# Altium PCB 6C-2L-1550um.PcbDoc (part 1 of 2)
Units mm, origin at the board's own origin, x right, y up, seen from the top; angles counter-clockwise.
Board outline 168.66 x 49.53 mm, 2 copper layers (Top Layer, Bottom Layer), stack 1.586 mm thick; 107 components, 120 nets, 578 pads, 231 vias.
Unrouted connection lines stored in the file: 1.
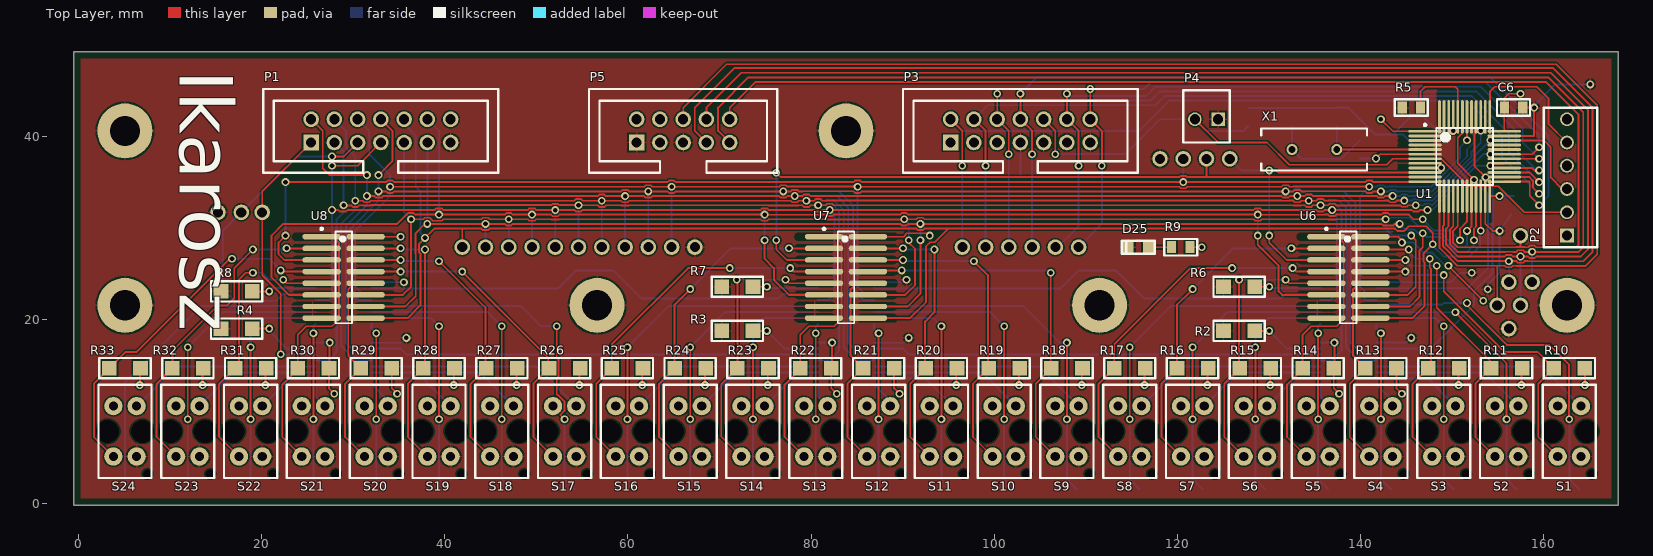
[diagram p0: Top Layer view]
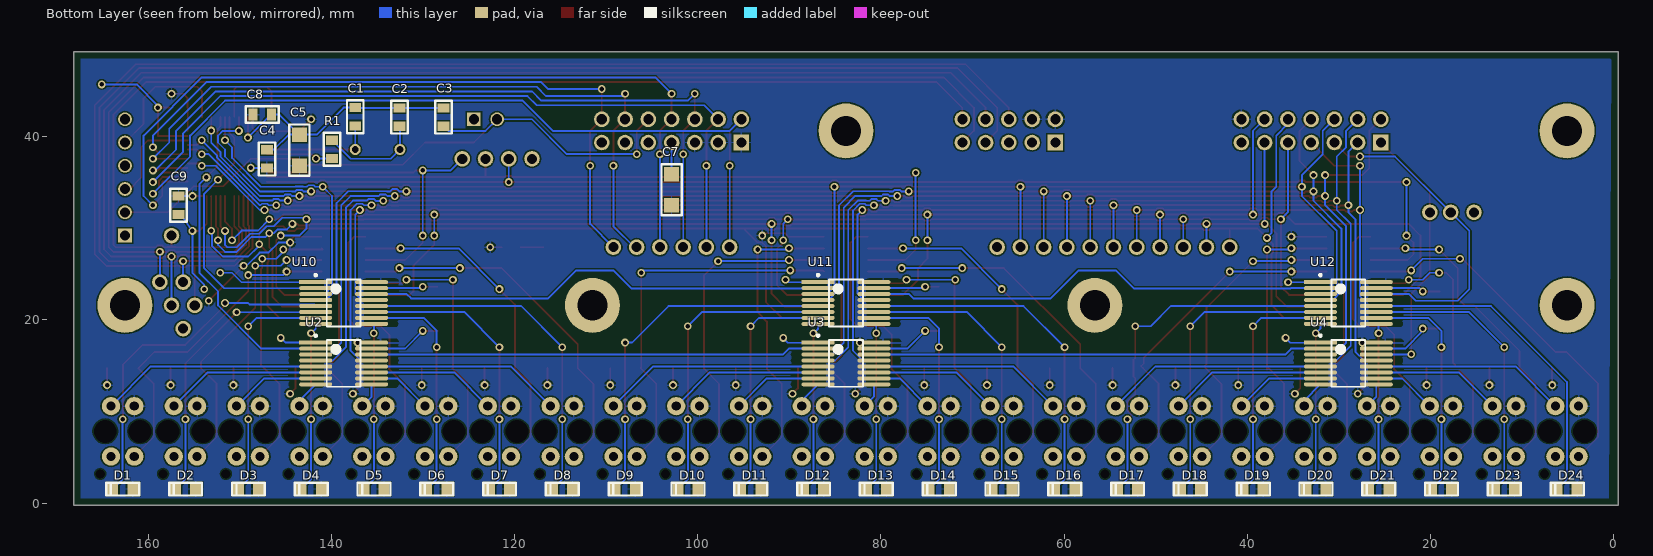
[diagram p1: Bottom Layer view, seen from below]
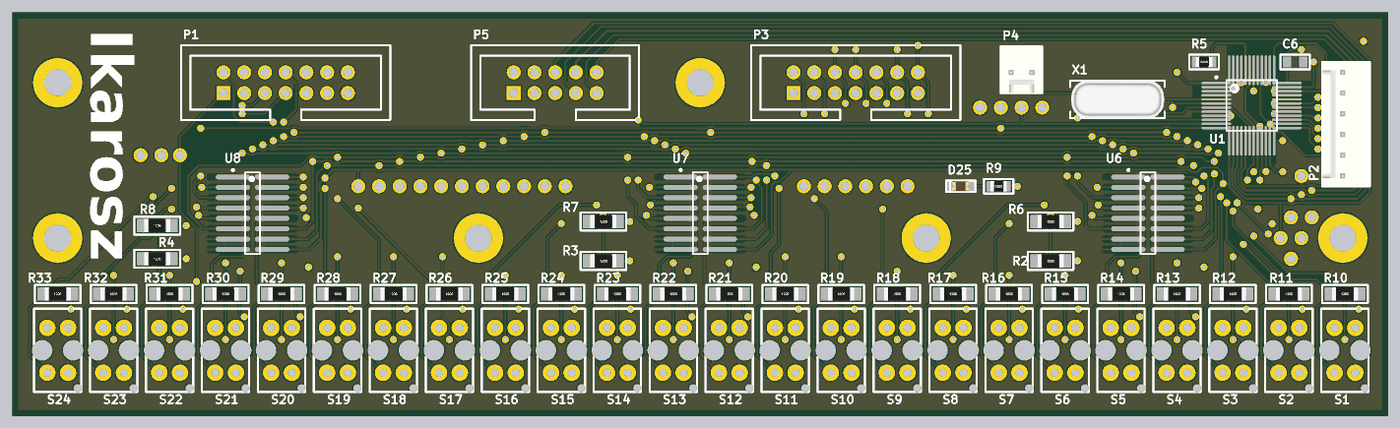
[diagram p3: 3D render of the assembled board from above, using the file's embedded part models]
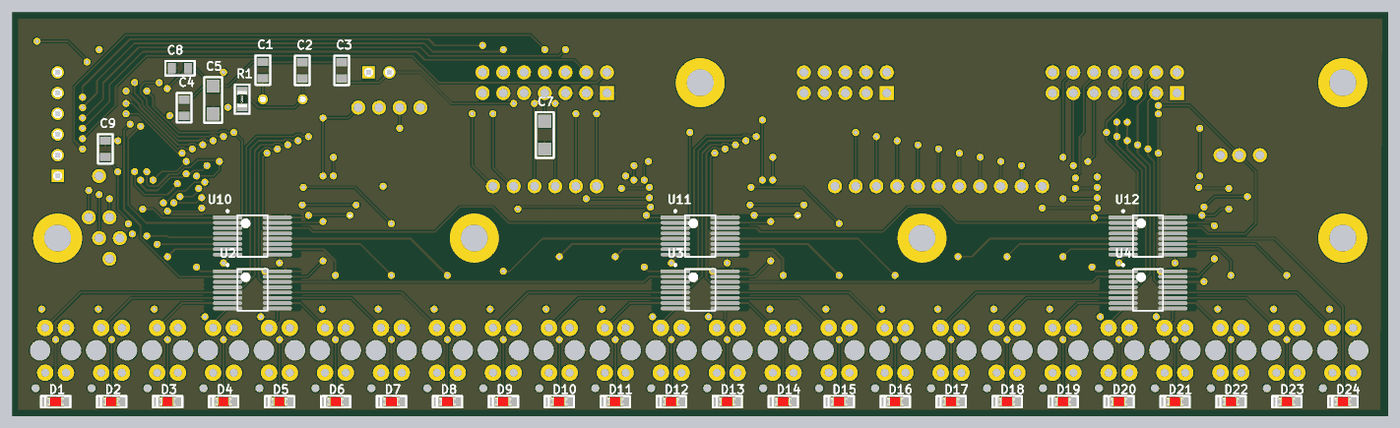
[diagram p4: 3D render of the assembled board from below, using the file's embedded part models]

## Layer stack, top to bottom
Top Solder: solder mask 0.0102, Solder Resist, Dk 3.5
Top Layer: signal copper 0.018
Dielectric1: core 1.55, FR-4, Dk 4.8
Bottom Layer: signal copper 0.018
Bottom Solder: solder mask 0.0102, Solder Resist, Dk 3.5

## Board outline
-0.508,-0.254 -0.508,49.276 168.148,49.276 168.148,-0.254

## Design rules (kind name [scope] priority, off if disabled: settings)
BoardOutlineClearance [All] p1: gap=0.25 ignorepadtopadclearanceinfootprint=FALSE except(0: Arc-SplitContinuation Track-SplitContinuation SMDPad-SplitContinuation THPad-SplitContinuation Via-SplitContinuation Fill-SplitContinuation Poly-SplitContinuation Region-SplitContinuation Text-SplitContinuation)
Clearance Clearance-xPP-xTP-xTT [All] p1: gap=0.15 ignorepadtopadclearanceinfootprint=FALSE except(0: Arc-Hole Track-Hole SMDPad-Hole THPad-Hole Via-Hole Fill-Hole Poly-Hole Region-Hole Text-Hole)
ComponentClearance [All] p1: gap=0.25 collisioncheckmode=3 verticalgap=0.25 showdistances=FALSE
DiffPairsRouting [All] p1: maxlimit=0.25 minlimit=0.25 mostfreqgap=0.25 toplayer_minwidth=0.381 toplayer_maxwidth=0.381 toplayer_prefwidth=0.381 bottomlayer_minwidth=0.381 bottomlayer_maxwidth=0.381 bottomlayer_prefwidth=0.381 maxuncoupledlength=12.5
Height [All] p1: minheight=0 maxheight=25 prefheight=12.5
HoleSize HoleSize-PTH [All] p1: absolutevalues=TRUE maxlimit=5 minlimit=0.25 maxpercent=80.000 minpercent=20.000
HoleToHoleClearance [All] p1: gap=0.35 allowstackedmicrovias=TRUE
MinimumAnnularRing "Minimum IAR  >0.45mm" [((ObjectKind = 'Pad') OR (ObjectKind = 'Via')) And (Layer = 'MultiLayer') And (HoleDiameter > AsMM(0.45))] p1: minimumring=0.175 // minimum inner annular ring for pads > 0.45mm finished hole size
MinimumAnnularRing "Minimum IAR <=0.45mm" [((ObjectKind = 'Pad') OR (ObjectKind = 'Via')) And (Layer = 'MultiLayer') And (HoleDiameter <= AsMM(0.45))] p2: minimumring=0.175 // minimum inner annular ring for pads <= 0.45mm finished hole size
MinimumSolderMaskSliver [All] p1: minsoldermaskwidth=0.08
PlaneClearance PlaneClearance-IPI [All] p1: clearance=0.25
PlaneConnect [All] p1: planeconnectstyle=Relief reliefexpansion=0.175 reliefentries=4 reliefconductorwidth=0.2 reliefairgap=0.2
PolygonConnect PolygonConnect-xTW [All] p1: connectstyle=Relief reliefconductorwidth=0.2 reliefentries=4 polygonreliefangle="90 Angle" airgapwidth=0.2
RoomDefinition back [InComponentClass('back')] p1: confinementstyle=ConfineIn formatcopy=TRUE lockcomponents=FALSE outline -15.494,-4.826 182.816,-4.826 182.816,73.406 -15.494,73.406
RoutingCorners [All] p1: cornerstyle=45-Degree minsetback=2.5 maxsetback=2.5
RoutingVias "RoutingVias > 0.45mm" [(ObjectKind = 'Via') And (HoleDiameter > AsMM(0.45))] p1: holewidth=0.5 width=0.85 viastyle="Through Hole" minholewidth=0.5 minwidth=0.85 maxholewidth=0.9 maxwidth=1.25 // finishet hole size > 0.45mm
RoutingVias "RoutingVias <= 0.45mm" [(ObjectKind = 'Via') And (HoleDiameter <= AsMM(0.45))] p2: holewidth=0.3 width=0.65 viastyle="Through Hole" minholewidth=0.25 minwidth=0.6 maxholewidth=0.45 maxwidth=0.8 // finishet hole size <= 0.45mm
SilkToSilkClearance [All] p1: silktosilkclearance=0.2
SilkToSolderMaskClearance SilkscreenOverComponentPads [IsPad] p1: minsilkscreentomaskgap=0.2 clearancetoexposedcopper=TRUE
SolderMaskExpansion [All] p1: expansion=0
UnRoutedNet [All] p1: checkbadconnections=TRUE
Width Width-xTW [All] p1: maxlimit=1.5 minlimit=0.15 preferedwidth=0.2
18 further rules are at their usual default settings.

## Components (designator, comment, footprint, x,y, rotation, side; value= is the part's Value field where it differs from the comment)
C1 "20pF" FP_0805_CAP_085 137.414,42.18 r90 bottom
C2 "20pF" FP_0805_CAP_085 132.588,42.148 r90 bottom
C3 "100nF" FP_0805_CAP_085 127.762,42.148 r270 bottom
C4 "10nF" FP_0805_CAP_085 147.066,37.576 r90 bottom
C5 "1uF" FP_1206_CAP_160 143.51,38.53 r90 bottom
C6 "100nF" FP_0805_CAP_085 156.718,43.18 r0 top
C7 "4u7" FP_1206_CAP_125 102.87,34.212 r270 bottom
C8 "100nF" FP_0805_CAP_085 147.574,42.418 r180 bottom
C9 "100nF" FP_0805_CAP_085 156.718,32.528 r270 bottom
D1 "LED" FP_0805_LED_RED 161.798,1.524 r0 bottom
D2 "LED" FP_0805_LED_RED 154.94,1.524 r0 bottom
D3 "LED" FP_0805_LED_RED 148.082,1.524 r0 bottom
D4 "LED" FP_0805_LED_RED 141.224,1.524 r0 bottom
D5 "LED" FP_0805_LED_RED 134.366,1.524 r0 bottom
D6 "LED" FP_0805_LED_RED 127.508,1.524 r0 bottom
D7 "LED" FP_0805_LED_RED 120.65,1.524 r0 bottom
D8 "LED" FP_0805_LED_RED 113.792,1.524 r0 bottom
D9 "LED" FP_0805_LED_RED 106.934,1.524 r0 bottom
D10 "LED" FP_0805_LED_RED 100.076,1.524 r0 bottom
D11 "LED" FP_0805_LED_RED 93.218,1.524 r0 bottom
D12 "LED" FP_0805_LED_RED 86.36,1.524 r0 bottom
D13 "LED" FP_0805_LED_RED 79.502,1.524 r0 bottom
D14 "LED" FP_0805_LED_RED 72.644,1.524 r0 bottom
D15 "LED" FP_0805_LED_RED 65.786,1.524 r0 bottom
D16 "LED" FP_0805_LED_RED 58.928,1.524 r0 bottom
D17 "LED" FP_0805_LED_RED 52.07,1.524 r0 bottom
D18 "LED" FP_0805_LED_RED 45.212,1.524 r0 bottom
D19 "LED" FP_0805_LED_RED 38.354,1.524 r0 bottom
D20 "LED" FP_0805_LED_RED 31.496,1.524 r0 bottom
D21 "LED" FP_0805_LED_RED 24.638,1.524 r0 bottom
D22 "LED" FP_0805_LED_RED 17.78,1.524 r0 bottom
D23 "LED" FP_0805_LED_RED 10.922,1.524 r0 bottom
D24 "LED" FP_0805_LED_RED 4.064,1.524 r0 bottom
D25 "LED" FP_0805_LED_RED 116.74,27.94 r180 top
P1 "elso_vonalszenzorhoz" FP_CONN14 25.4,39.37 r0 top
P2 "Program" FP_CONN6_TAP_254MM 162.56,29.21 r0 top
P3 "MainBoard" FP_CONN14 95.25,39.37 r0 top
P4 "Reset" FP_CONN2_TAP_254MM 124.46,41.91 r90 top
P5 "elso_vonalszenzorhoz_anal" FP_CONN10 60.96,39.37 r0 top
R1 "390" FP_0805_RES 139.954,38.624 r270 bottom
R2 "1K" FP_1206_RES 126.746,18.796 r0 top
R3 "1K" FP_1206_RES 71.96,18.796 r0 top
R4 "1K" FP_1206_RES 17.272,19.05 r0 top
R5 "10k" FP_0805_RES 145.558,43.18 r180 top
R6 "1K" FP_1206_RES 126.746,23.622 r0 top
R7 "1K" FP_1206_RES 71.96,23.622 r0 top
R8 "1K" FP_1206_RES 17.272,23.114 r0 top
R9 "1k" FP_0805_RES 120.38,27.94 r0 top
R10 "22K" FP_1206_RES 162.814,14.732 r0 top
R11 "22K" FP_1206_RES 155.956,14.732 r0 top
R12 "22K" FP_1206_RES 149.098,14.732 r0 top
R13 "22K" FP_1206_RES 142.24,14.732 r0 top
R14 "22K" FP_1206_RES 135.382,14.732 r0 top
R15 "22K" FP_1206_RES 128.524,14.732 r0 top
R16 "22K" FP_1206_RES 121.666,14.732 r0 top
R17 "22K" FP_1206_RES 114.808,14.732 r0 top
R18 "22K" FP_1206_RES 107.95,14.732 r0 top
R19 "22K" FP_1206_RES 101.092,14.732 r0 top
R20 "22K" FP_1206_RES 94.234,14.732 r0 top
R21 "22K" FP_1206_RES 87.376,14.732 r0 top
R22 "22K" FP_1206_RES 80.518,14.732 r0 top
R23 "22K" FP_1206_RES 73.66,14.732 r0 top
R24 "22K" FP_1206_RES 66.802,14.732 r0 top
R25 "22K" FP_1206_RES 59.944,14.732 r0 top
R26 "22K" FP_1206_RES 53.086,14.732 r0 top
R27 "22K" FP_1206_RES 46.228,14.732 r0 top
R28 "22K" FP_1206_RES 39.37,14.732 r0 top
R29 "22K" FP_1206_RES 32.512,14.732 r0 top
R30 "22K" FP_1206_RES 25.654,14.732 r0 top
R31 "22K" FP_1206_RES 18.796,14.732 r0 top
R32 "22K" FP_1206_RES 11.938,14.732 r0 top
R33 "22K" FP_1206_RES 5.08,14.732 r0 top
S1 "TCRT5000" TCRT5000 160.914,7.83 r90 top
S2 "TCRT5000" TCRT5000 154.056,7.83 r90 top
S3 "TCRT5000" TCRT5000 147.198,7.83 r90 top
S4 "TCRT5000" TCRT5000 140.34,7.83 r90 top
S5 "TCRT5000" TCRT5000 133.482,7.83 r90 top
S6 "TCRT5000" TCRT5000 126.624,7.83 r90 top
S7 "TCRT5000" TCRT5000 119.766,7.83 r90 top
S8 "TCRT5000" TCRT5000 112.908,7.83 r90 top
S9 "TCRT5000" TCRT5000 106.05,7.83 r90 top
S10 "TCRT5000" TCRT5000 99.192,7.83 r90 top
S11 "TCRT5000" TCRT5000 92.334,7.83 r90 top
S12 "TCRT5000" TCRT5000 85.476,7.83 r90 top
S13 "TCRT5000" TCRT5000 78.618,7.83 r90 top
S14 "TCRT5000" TCRT5000 71.76,7.83 r90 top
S15 "TCRT5000" TCRT5000 64.902,7.83 r90 top
S16 "TCRT5000" TCRT5000 58.044,7.83 r90 top
S17 "TCRT5000" TCRT5000 51.186,7.83 r90 top
S18 "TCRT5000" TCRT5000 44.328,7.83 r90 top
S19 "TCRT5000" TCRT5000 37.47,7.83 r90 top
S20 "TCRT5000" TCRT5000 30.612,7.83 r90 top
S21 "TCRT5000" TCRT5000 23.754,7.83 r90 top
S22 "TCRT5000" TCRT5000 16.896,7.83 r90 top
S23 "TCRT5000" TCRT5000 10.038,7.83 r90 top
S24 "TCRT5000" TCRT5000 3.18,7.83 r90 top
U1 "STM32F030CCT6" STM32F030CCT6 151.384,37.846 r0 top
U2 "STP08CP05TTR" TSOP65P640X120-16M 138.684,15.24 r180 bottom
U3 "STP08CP05TTR" TSOP65P640X120-16M 83.82,15.24 r180 bottom
U4 "STP08CP05TTR" TSOP65P640X120-16M 28.956,15.24 r180 bottom
U6 "4051" SO16_N 138.684,24.638 r0 top
U7 "4051" SO16_N 83.82,24.638 r0 top
U8 "4051" SO16_N 28.956,24.638 r0 top
U10 "STP08CP05TTR" TSOP65P640X120-16M 138.684,21.844 r180 bottom
U11 "STP08CP05TTR" TSOP65P640X120-16M 83.82,21.844 r180 bottom
U12 "STP08CP05TTR" TSOP65P640X120-16M 28.956,21.844 r180 bottom
X1 "8MHz" FP_CRYSTAL_HC49 134.974,38.608 r0 top

## Footprints (in the part's own frame and the unit in brackets; to place one, negate y for a bottom-side part, rotate by r counter-clockwise, add the part's x,y. Pads: shape width x height; smd on the part's side, far side on the other; paste and mask are expansions set on the pad)
FP_0805_CAP_085 [mm] "0805 kapacitás YAGEO 0.85mm magas"
  rect 1x1.3 smd: 1(-1,0) 2(1,0)
  silkscreen extent -1.8,-0.9 1.8,0.9, body extent -1,-0.64 1.03,0.64, height 0.85
FP_0805_LED_RED [mm] "0805 méretû piros LED"
  rect 1.2x1.3 smd: A(-0.1,0) K(2.1,0)
  silkscreen extent -0.8,-0.7 2.8,0.7, body extent 0.01,-0.63 2.03,0.62, height 1.1
FP_0805_RES [mm] "0805 ellenállás"
  rect 1x1.3 smd: 1(-1,0) 2(1,0)
  silkscreen extent -1.8,-0.9 1.8,0.9, body extent -1,-0.62 1,0.63, height 0.62
FP_1206_CAP_125 [mm] "1206 kapacitás 1.25 mm"
  rect 1.6x1.6 smd: 1(-1.7,0) 2(1.7,0)
  silkscreen extent -2.8,-1.1 2.8,1.1, body extent -1.52,-0.79 1.58,0.79, height 1.25
FP_1206_CAP_160 [mm] "1206 kapacitás 1.6mm magas"
  rect 1.6x1.6 smd: 1(-1.7,0) 2(1.7,0)
  silkscreen extent -2.8,-1.1 2.8,1.1, body extent -1.52,-0.79 1.58,0.79, height 1.6
FP_1206_RES [mm] "1206 ellenállás"
  rect 1.6x1.6 smd: 1(-1.7,0) 2(1.7,0)
  silkscreen extent -2.8,-1.1 2.8,1.1, body extent -1.6,-0.8 1.6,0.8, height 0.62
FP_CONN2_TAP_254MM [mm] "álló két pólusú tápcsatlakozó 2.54mm"
  rect 1.5x1.5 hole 1.1: 1(0,0)
  round 1.5 hole 1.1: 2(0,2.54)
  silkscreen extent -2.54,-1.27 3.17,3.81, body extent -2.52,-1.27 3.28,3.81, height 11.56
FP_CONN6_TAP_254MM [mm] "álló hat pólusú tápcsatlakozó 2.54mm"
  rect 1.5x1.5 hole 1.1: 1(0,0)
  round 1.5 hole 1.1: 2(0,2.54) 3(0,5.08) 4(0,7.62) 5(0,10.16) 6(0,12.7)
  silkscreen extent -2.54,-1.27 3.3,13.97, body extent -2.52,-1.27 3.28,13.97, height 11.56
FP_CONN10 [mm]
  rect 1.7x1.7 hole 1.1: 1(0,0)
  round 1.7 hole 1.1: 2(0,2.54) 3(2.54,0) 4(2.54,2.54) 5(5.08,0) 6(5.08,2.54) 7(7.62,0) 8(7.62,2.54) 9(10.16,0) 10(10.16,2.54)
  silkscreen extent -5.21,-3.3 15.37,5.84
FP_CONN14 [mm]
  rect 1.7x1.7 hole 1.1: 1(0,0)
  round 1.7 hole 1.1: 2(0,2.54) 3(2.54,0) 4(2.54,2.54) 5(5.08,0) 6(5.08,2.54) 7(7.62,0) 8(7.62,2.54) 9(10.16,0) 10(10.16,2.54) 11(12.7,0) 12(12.7,2.54) 13(15.24,0) 14(15.24,2.54)
  silkscreen extent -5.21,-3.3 20.45,5.84
FP_CRYSTAL_HC49 [mm] "HC49"
  round 1.2 hole 0.762: 1(-2.44,0) 2(2.44,0)
  silkscreen extent -5.82,-2.29 5.74,2.29, body extent -5.68,-2.35 5.67,2.3, height 3.5
SO16_N [mm] "SOIC, 16-Leads, Body 9.9x3.9mm, Pitch 1.27mm, IPC Medium Density"
  oval 4.2x0.6 smd: 1(-2.4,4.445) 2(-2.4,3.175) 3(-2.4,1.905) 4(-2.4,0.635) 5(-2.4,-0.635) 6(-2.4,-1.905) 7(-2.4,-3.175) 8(-2.4,-4.445) 9(2.4,-4.445) 10(2.4,-3.175) 11(2.4,-1.905) 12(2.4,-0.635) 13(2.4,0.635) 14(2.4,1.905) 15(2.4,3.175) 16(2.4,4.445)
  silkscreen extent -2.52,-5 0.9,5.42, body extent -2,-5 2,5, height 1.75
STM32F030CCT6 [mm]
  oval 3.65x0.3 smd: 1(-4.325,2.75) 2(-4.325,2.25) 3(-4.325,1.75) 4(-4.325,1.25) 5(-4.325,0.75) 6(-4.325,0.25) 7(-4.325,-0.25) 8(-4.325,-0.75) 9(-4.325,-1.25) 10(-4.325,-1.75) 11(-4.325,-2.25) 12(-4.325,-2.75) 25(4.325,-2.75) 26(4.325,-2.25) 27(4.325,-1.75) 28(4.325,-1.25) 29(4.325,-0.75) 30(4.325,-0.25) 31(4.325,0.25) 32(4.325,0.75) 33(4.325,1.25) 34(4.325,1.75) 35(4.325,2.25) 36(4.325,2.75)
  oval 0.3x3.65 smd: 13(-2.75,-4.325) 14(-2.25,-4.325) 15(-1.75,-4.325) 16(-1.25,-4.325) 17(-0.75,-4.325) 18(-0.25,-4.325) 19(0.25,-4.325) 20(0.75,-4.325) 21(1.25,-4.325) 22(1.75,-4.325) 23(2.25,-4.325) 24(2.75,-4.325) 37(2.75,4.325) 38(2.25,4.325) 39(1.75,4.325) 40(1.25,4.325) 41(0.75,4.325) 42(0.25,4.325) 43(-0.25,4.325) 44(-0.75,4.325) 45(-1.25,4.325) 46(-1.75,4.325) 47(-2.25,4.325) 48(-2.75,4.325)
  silkscreen extent -4.45,-3.1 3.1,3.57, body extent -3.5,-3.5 3.5,3.5, height 1.6
TCRT5000 [mm]
  round 2 hole 1: 1(2.75,-0.63) 2(2.75,-3.17) 3(-2.75,-0.63) 4(-2.75,-3.17)
  round 0 hole 2.5: MH1(0,0) MH2(0,-3.8)
  round 0 hole 1: MH3(-4.65,-4.35)
  silkscreen extent -5.1,-4.8 5.1,1
TSOP65P640X120-16M [mm] "TSOP, 16-Leads, Body 5,00x4,40mm, Pitch 0,65mm, IPC Low Density"
  rect 3.6x0.45 smd: 1(-3.05,2.275)
  oval 3.6x0.45 smd: 2(-3.05,1.625) 3(-3.05,0.975) 4(-3.05,0.325) 5(-3.05,-0.325) 6(-3.05,-0.975) 7(-3.05,-1.625) 8(-3.05,-2.275) 9(3.05,-2.275) 10(3.05,-1.625) 11(3.05,-0.975) 12(3.05,-0.325) 13(3.05,0.325) 14(3.05,0.975) 15(3.05,1.625) 16(3.05,2.275)
  silkscreen extent -3.17,-2.55 1.85,3.17, body extent -2.25,-2.55 2.25,2.55, height 1.2

## Part data
C1 C2 C3 C4 C6 C7 C8 C9: library part CAP, "Capacitor"
C5: library part CAP_ELECT, "Polarized Capacitor"
D1 D2 D3 D4 D5 D6 D7 D8 D9 D10 D11 D12 D13 D14 D15 D16 D17 D18 D19 D20 D21 D22 D23 D24 D25: "Typical RED GaAs LED"
P1 P3: library part Connector_14pin, "14pin Connector"
P2: library part Connector_6pin, "6pin connector"
P4: library part Connector_2pin, "2pin connector"
P5: library part Connector_10pin, "10pin Connector"
R1 R2 R3 R4 R5 R6 R7 R8 R9: library part RES, "Resistor"
R10 R11 R12 R13 R14 R15 R16 R17 R18 R19 R20 R21 R22 R23 R24 R25 R26 R27 R28 R29 R30 R31 R32 R33: library part Res2, "Resistor", Name="22K0 1206 1% WR12X2202FTL 0.25W (WAL)", Reference=80-42-61, Supplier=Lomex
S1 S2 S3 S4 S5 S6 S7 S8 S9 S10 S11 S12 S13 S14 S15 S16 S17 S18 S19 S20 S21 S22 S23 S24: "Reflective Optical Sensor", Name="TCRT5000 -  Reflective Photo Interrupter, Phototransistor, Through Hole, 15 mm, 60 mA, 5 Vr, 1.25 Vf", Reference=1470066, Supplier=Farnell
U2 U3 U4 U10 U11 U12: "Low voltage, low current power 8-bit shift register"
U6 U7 U8: library part 74HC4051, "8:1 analog mux", Name="74HC4051D (NXP) 8-INPUT ANALOG MULTIPLEXER/DEMULTIPLEXER SO-16 MUX/DEMUX", Reference=87-05-61, Supplier=Lomex
X1: library part Crystal, "Quarz Crystal"
U1: Name=STM32F030CCT6, Supplier=Farnell

## Free pads (board coordinates)
  round 6 hole 3.3: 2(5.08,40.64) 2(83.82,40.64) 3(56.642,21.59) 3(111.506,21.59) 5(162.56,21.59) 6(5.08,21.59)
  round 1.7 hole 1.1: 11(96.52,27.94) 12(99.06,27.94) 13(101.6,27.94) 14(104.14,27.94) 15(106.68,27.94) 16(109.22,27.94) 19(125.73,37.592) 20(123.19,37.592) 21(118.11,37.592) 21(120.65,37.592) 39(17.78,31.75) 40(20.066,31.75) 41(41.91,27.94) 42(44.45,27.94) 43(46.99,27.94) 44(49.53,27.94) 45(52.07,27.94) 46(54.61,27.94) 47(57.15,27.94) 48(59.69,27.94) 49(62.23,27.94) 50(64.77,27.94) 51(67.31,27.94) 52(15.24,31.75) 58(158.75,24.13) 59(156.21,24.13) 60(154.94,21.59) 61(157.48,21.59) 62(157.48,29.21) 63(156.21,19.05)

## Via types
v1: diameter 0.85, hole 0.5, Top Layer to Bottom Layer, 231 vias

## Nets (pads, with @x,y where several pads share a name; then routed paths per layer and width w, separated by ;. In a path a pad name is that pad's centre, name@x,y a point inside that pad or via, vN(x,y) a via of type N, cw(c..) or ccw(c..) an arc to the next point about the centre after c; other vN are vias at no path point)
3V3: C4.1 C5.1 C6.1 C7.2 C8.1 C9.1 D1.A D2.A D3.A D4.A D5.A D6.A D7.A D8.A D9.A D10.A D11.A D12.A D13.A D14.A D15.A D16.A D17.A D18.A D19.A D20.A D21.A D22.A D23.A D24.A P1.14 P3.1 P3.3 P3.5 P5.2 P5.4 R9.2 R10.2 R11.2 R12.2 R13.2 R14.2 R15.2 R16.2 R17.2 R18.2 R19.2 R20.2 R21.2 R22.2 R23.2 R24.2 R25.2 R26.2 R27.2 R28.2 R29.2 R30.2 R31.2 R32.2 R33.2 S1.1 S2.1 S3.1 S4.1 S5.1 S6.1 S7.1 S8.1 S9.1 S10.1 S11.1 S12.1 S13.1 S14.1 S15.1 S16.1 S17.1 S18.1 S19.1 S20.1 S21.1 S22.1 S23.1 S24.1 U1.1 U1.9 U1.24 U1.36 U1.48 U2.16 U3.16 U4.16 U6.16 U7.16 U8.16 U10.16 U11.16 U12.16 | length 112.9
  Top Layer w0.2: v1(6.702,12.876) R33.2@6.702,14.732 ; v1(13.56,12.876) R32.2@13.56,14.732 ; v1(20.418,12.876) R31.2@20.418,14.732 ; v1(27.432,17.526) 27.432,15.296 27.178,15.042 27.421,14.799 R30.2@27.354,14.732 27.354,12.524 v1(27.94,11.938) ; U8.16@31.356,29.083 v1(35.179,29.083) ; R29.2@34.212,14.732 34.212,12.524 v1(34.798,11.938) ; v1(40.992,12.876) R28.2@40.992,14.732 ; v1(47.85,12.876) R27.2@47.85,14.732 ; v1(54.708,12.876) R26.2@54.708,14.732 ; v1(61.566,12.876) R25.2@61.566,14.732 ; v1(68.424,12.876) R24.2@68.424,14.732 ; v1(75.282,12.876) R23.2@75.282,14.732 ; v1(82.296,17.526) 82.296,15.318 82.042,15.064 82.296,14.81 R22.2@82.218,14.732 82.218,12.524 v1(82.804,11.938) ; U7.16@86.22,29.083 90.104,29.083 90.476,29.455 92.719,29.455 v1(92.964,29.21) ; R21.2@89.076,14.732 89.076,12.524 v1(89.662,11.938) ; v1(95.856,12.876) R20.2@95.856,14.732 ; v1(102.714,12.876) R19.2@102.714,14.732 ; v1(109.572,12.876) R18.2@109.572,14.732 ; v1(116.43,12.876) R17.2@116.43,14.732 ; R9.2@121.38,27.94 v1(122.682,27.94) ; v1(123.288,12.876) R16.2@123.288,14.732 ; v1(130.146,12.876) R15.2@130.146,14.732 ; v1(137.16,17.526) 137.16,15.296 136.906,15.042 137.149,14.799 R14.2@137.082,14.732 137.082,12.524 v1(137.668,11.938) ; U6.16@141.084,29.083 144.145,29.083 144.526,28.702 v1(144.526,28.448) ; v1(142.24,41.91) 143.554,40.596 U1.1@147.059,40.596 148.292,40.596 148.634,40.938 U1.48@148.634,42.171 ; R13.2@143.94,14.732 143.94,12.524 v1(144.526,11.938) ; U1.9@147.059,36.596 v1(148.824,36.596) ; v1(149.606,25.908) v1(153.416,22.098) ; v1(150.72,12.876) R12.2@150.72,14.732 ; U1.24@154.134,33.521 v1(155.187,33.521) ; U1.36@155.709,40.596 155.709,43.171 C6.1@155.718,43.18 155.718,44.212 156.21,44.704 v1(157.48,44.704) ; v1(157.578,12.876) R11.2@157.578,14.732 ; v1(164.514,12.876) R10.2@164.514,14.732
  Bottom Layer w0.2: U4.16@25.906,17.515 25.917,17.526 v1(27.432,17.526) ; U3.16@80.77,17.515 82.285,17.515 82.274,17.526 v1(82.296,17.526) ; U2.16@135.634,17.515 135.645,17.526 v1(137.16,17.526) ; v1(144.526,28.448) 145.796,28.448 146.899,27.345 147.854,27.345 149.291,25.908 v1(149.606,25.908) ; C4.1@147.066,36.576 147.086,36.596 v1(148.824,36.596) ; v1(155.187,33.521) 155.194,33.528 C9.1@156.718,33.528
ADC_CH0: pad.19 U1.10 U6.3 | length 36.8
  Top Layer w0.2: v1(130.048,29.21) 130.048,28.448 131.953,26.543 U6.3@136.284,26.543 ; v1(130.048,36.322) 130.81,36.322 131.036,36.096 U1.10@147.059,36.096
  Bottom Layer w0.2: pad.19@125.73,37.592 127,36.322 v1(130.048,36.322) v1(130.048,29.21)
ADC_CH1: pad.20 U1.11 U7.3 | length 87.3
  Top Layer w0.2: v1(76.2,28.702) 76.2,27.686 77.343,26.543 U7.3@81.42,26.543 ; v1(76.2,36.068) 76.672,35.596 120.239,35.596 120.37,35.727 120.93,35.727 121.061,35.596 123.19,35.596 ; pad.20@123.19,37.592 123.19,35.596 ; U1.11@147.059,35.596 123.19,35.596
  Bottom Layer w0.2: v1(76.2,28.702) 76.236,28.738 76.236,36.032 v1(76.2,36.068)
ADC_CH2: pad.21@120.65,37.592 U1.12 U8.3 | length 140.8
  Top Layer w0.2: v1(22.606,29.21) 21.844,28.448 21.844,27.178 22.479,26.543 U8.3@26.556,26.543 ; v1(22.606,35.052) 33.589,35.052 33.756,35.219 34.316,35.219 34.483,35.052 61.796,35.052 61.805,35.061 62.655,35.061 62.664,35.052 64.323,35.052 64.49,35.219 65.05,35.219 65.217,35.052 76.528,35.052 76.537,35.061 77.387,35.061 77.396,35.052 82.37,35.052 82.379,35.061 83.229,35.061 83.247,35.043 84.634,35.043 84.81,35.219 85.37,35.219 85.546,35.043 131.383,35.043 131.401,35.061 132.251,35.061 132.26,35.052 140.523,35.052 140.69,35.219 141.25,35.219 141.417,35.052 147.015,35.052 U1.12@147.059,35.096
  Bottom Layer w0.2: v1(22.606,29.21) v1(22.606,35.052) ; v1(120.65,35.052) pad.21@120.65,37.592
ADC_CH3: P5.6 pad.60 U1.13 | length 149.8
  Top Layer w0.2: P5.6@66.04,41.91 66.04,43.18 70.77,47.91 161.386,47.91 165.862,43.434 165.862,27.178 164.583,25.899 157.055,25.899 157.046,25.908 156.657,25.908 156.49,25.741 155.93,25.741 155.763,25.908 154.94,25.908 ; U1.13@148.634,33.521 148.634,27.863 150.589,25.908 154.94,25.908 ; pad.60@154.94,21.59 154.94,25.908
ADC_CH4: P5.7 pad.59 U1.14 | length 147.1
  Top Layer w0.2: P5.7@68.58,39.37 67.31,40.64 67.31,43.18 71.628,47.498 161.036,47.498 165.354,43.18 165.354,27.432 164.329,26.407 158.325,26.407 158.316,26.416 157.927,26.416 157.76,26.249 157.2,26.249 157.033,26.416 v1(156.21,26.416) 155.872,26.416 150.635,26.416 149.134,27.917 149.002,28.049 149.002,30.249 149.134,30.381 U1.14@149.134,33.521
  Bottom Layer w0.2: pad.59@156.21,24.13 v1(156.21,26.416)
ADC_CH5: P5.8 pad.61 U1.15 | length 143.4
  Top Layer w0.2: P5.8@68.58,41.91 68.58,43.18 72.39,46.99 160.782,46.99 164.846,42.926 164.846,27.686 164.084,26.924 159.197,26.924 159.03,26.757 158.47,26.757 158.303,26.924 v1(157.48,26.924) 156.657,26.924 156.49,27.091 155.93,27.091 155.763,26.924 150.622,26.924 149.352,28.194 149.352,29.972 149.634,30.254 U1.15@149.634,33.521
  Bottom Layer w0.2: pad.61@157.48,21.59 v1(157.48,26.924)
ADC_CH6: P5.9 pad.58 U1.16 | length 140.5
  Top Layer w0.2: P5.9@71.12,39.37 69.85,40.64 69.85,43.18 73.152,46.482 160.528,46.482 164.338,42.672 164.338,27.94 163.83,27.432 v1(158.75,27.432) 157.927,27.432 157.76,27.599 157.2,27.599 157.033,27.432 156.644,27.432 156.635,27.441 155.785,27.441 155.776,27.432 150.622,27.432 149.764,28.29 149.764,29.863 150.134,30.233 U1.16@150.134,33.521
  Bottom Layer w0.2: pad.58@158.75,24.13 v1(158.75,27.432)
ADC_CH7: P5.10 pad.62 U1.17 | length 131.6
  Top Layer w0.2: P5.10@71.12,41.91 71.12,43.18 73.914,45.974 160.274,45.974 163.83,42.418 163.83,28.194 163.576,27.94 159.197,27.94 159.03,28.107 158.47,28.107 158.303,27.94 157.914,27.94 157.905,27.949 157.48,27.949 ; U1.17@150.634,33.521 150.634,30.238 150.114,29.718 150.114,28.448 150.622,27.94 157.046,27.94 157.055,27.949 157.48,27.949 ; pad.62@157.48,29.21 157.48,27.949
EN_sensors: P1.12 pad.44 U1.19 U6.6 U7.6 U8.6 | length 191.8
  Top Layer w0.2: U8.6@26.556,22.733 22.987,22.733 21.082,24.638 21.082,29.21 22.352,30.48 34.798,30.48 35.963,31.645 36.024,31.645 36.042,31.663 36.602,31.663 36.769,31.496 37.666,31.496 37.675,31.505 38.525,31.505 38.534,31.496 v1(39.37,31.496) 39.379,31.505 46.552,31.505 46.71,31.663 47.27,31.663 47.428,31.505 v1(49.53,31.505) 51.605,31.505 51.79,31.32 52.35,31.32 52.535,31.505 54.176,31.505 54.185,31.496 55.035,31.496 55.044,31.505 74.921,31.505 v1(74.93,31.496) 74.939,31.487 81.197,31.487 81.206,31.496 81.595,31.496 81.762,31.329 82.322,31.329 82.489,31.496 89.723,31.496 89.89,31.663 90.45,31.663 90.617,31.496 91.006,31.496 91.015,31.505 128.769,31.505 v1(128.778,31.496) 128.787,31.487 136.061,31.487 136.07,31.496 136.459,31.496 136.626,31.329 137.186,31.329 137.353,31.496 142.301,31.496 142.468,31.663 143.028,31.663 143.195,31.496 145.288,31.496 145.796,30.988 v1(146.799,30.988) ; v1(74.93,28.702) 74.93,26.67 75.942,25.658 75.942,24.388 77.597,22.733 U7.6@81.42,22.733 ; v1(128.778,29.21) 128.778,28.194 131.064,25.908 131.064,23.114 131.445,22.733 U6.6@136.284,22.733 ; v1(150.876,28.702) 150.876,29.972 151.634,30.73 U1.19@151.634,33.521
  Bottom Layer w0.2: P1.12@38.1,41.91 39.37,40.64 v1(39.37,31.496) ; pad.44@49.53,27.94 v1(49.53,31.505) ; v1(74.93,28.702) v1(74.93,31.496) ; v1(128.778,29.21) v1(128.778,31.496) ; v1(146.799,30.988) 148.035,29.752 149.826,29.752 v1(150.876,28.702)
fbLED_LE: P1.8 pad.49 U1.45 U10.4 U11.4 U12.4 | length 199.1
  Top Layer w0.2: v1(32.766,34.036) 33.589,34.036 33.756,33.869 34.316,33.869 34.483,34.036 59.252,34.036 59.41,34.194 59.97,34.194 60.128,34.036 v1(62.23,34.036) 64.323,34.036 64.49,33.869 65.05,33.869 65.217,34.036 v1(76.962,34.036) 77.785,34.036 77.952,34.203 78.512,34.203 78.679,34.036 79.068,34.036 79.077,34.045 84.634,34.045 84.81,33.869 85.37,33.869 85.537,34.036 120.216,34.036 120.225,34.027 131.817,34.027 v1(131.826,34.036) 132.649,34.036 132.816,34.203 133.376,34.203 133.543,34.036 133.932,34.036 133.941,34.045 140.514,34.045 140.69,33.869 141.25,33.869 141.417,34.036 v1(142.24,34.036) ; v1(32.766,35.814) 34.29,37.338 34.29,40.64 P1.8@33.02,41.91 ; v1(150.114,40.64) 150.114,42.151 U1.45@150.134,42.171
  Bottom Layer w0.2: U12.4@32.006,22.169 30.663,22.169 29.718,23.114 29.718,29.972 32.766,33.02 v1(32.766,34.036) v1(32.766,35.814) ; pad.49@62.23,27.94 v1(62.23,34.036) ; v1(76.962,34.036) 77.785,34.036 77.952,34.203 78.512,34.203 78.679,34.036 79.068,34.036 79.077,34.045 83.049,34.045 84.582,32.512 84.582,23.368 85.781,22.169 U11.4@86.87,22.169 ; v1(131.826,34.036) 132.588,34.036 132.842,34.29 133.35,34.29 133.604,34.036 133.932,34.036 133.941,34.045 138.167,34.045 139.446,32.766 139.446,23.368 140.645,22.169 U10.4@141.734,22.169 ; v1(142.24,34.036) 143.063,34.036 143.23,34.203 143.79,34.203 143.957,34.036 144.333,34.036 144.355,34.058 145.205,34.058 145.227,34.036 147.828,34.036 151.638,37.846 151.638,38.608 152.4,39.37 152.4,40.132 151.892,40.64 v1(150.114,40.64)
fbLED_OE: P1.7 pad.45 U1.29 U10.13 U11.13 U12.13 | length 180.9
  Top Layer w0.2: v1(27.686,32.004) 28.368,32.004 28.535,31.837 29.236,31.837 29.394,31.995 35.879,31.995 35.897,32.013 38.932,32.013 39.09,32.171 39.65,32.171 39.826,31.995 46.547,31.995 46.565,32.013 47.415,32.013 47.433,31.995 49.065,31.995 49.25,32.18 49.81,32.18 49.995,31.995 v1(52.07,31.995) 52.079,31.986 54.19,31.986 54.33,31.846 54.89,31.846 55.03,31.986 74.465,31.986 74.65,32.171 75.21,32.171 75.386,31.995 79.927,31.995 79.936,32.004 80.325,32.004 80.492,31.837 81.052,31.837 81.219,32.004 v1(82.042,32.004) 82.051,32.013 90.595,32.013 90.604,32.004 128.331,32.004 128.498,32.171 129.058,32.171 129.234,31.995 134.791,31.995 134.8,32.004 135.189,32.004 135.356,31.837 135.916,31.837 136.083,32.004 v1(136.906,32.004) 136.915,32.013 143.681,32.013 143.69,32.004 145.603,32.004 145.77,31.837 146.33,31.837 146.497,32.004 v1(147.32,32.004) ; v1(27.686,36.83) 30.48,36.83 P1.7@33.02,39.37 ; v1(154.178,36.83) 154.444,37.096 U1.29@155.709,37.096
  Bottom Layer w0.2: U12.13@25.906,22.169 27.249,22.169 27.686,22.606 v1(27.686,32.004) v1(27.686,36.83) ; pad.45@52.07,27.94 v1(52.07,31.995) ; U11.13@80.77,22.169 81.859,22.169 82.55,22.86 82.55,31.496 v1(82.042,32.004) ; U10.13@135.634,22.169 136.723,22.169 137.414,22.86 137.414,31.496 v1(136.906,32.004) ; v1(147.32,32.004) 147.828,32.004 152.654,36.83 v1(154.178,36.83)
fbLED_SCK: P1.6 pad.50 U1.42 U10.3 U11.3 U12.3 | length 180.2
  Top Layer w0.2: v1(34.036,34.544) 61.783,34.544 61.95,34.711 62.51,34.711 62.677,34.544 v1(64.77,34.544) 76.515,34.544 76.682,34.711 77.242,34.711 77.4,34.553 85.081,34.553 v1(85.09,34.544) 120.203,34.544 120.37,34.377 120.93,34.377 121.097,34.544 131.379,34.544 131.546,34.711 132.106,34.711 132.273,34.544 132.662,34.544 132.671,34.553 140.961,34.553 v1(140.97,34.544) ; U1.42@151.634,42.171 151.638,42.167 v1(151.638,39.624)
  Bottom Layer w0.2: P1.6@30.48,41.91 31.75,40.64 31.75,38.1 34.036,35.814 v1(34.036,34.544) 34.036,33.528 30.226,29.718 30.226,23.622 31.029,22.819 U12.3@32.006,22.819 ; pad.50@64.77,27.94 v1(64.77,34.544) ; v1(85.09,34.544) 85.09,23.622 85.893,22.819 U11.3@86.87,22.819 ; U10.3@141.734,22.819 140.757,22.819 139.954,23.622 139.954,33.528 v1(140.97,34.544) 141.793,34.544 141.96,34.711 142.52,34.711 142.687,34.544 143.076,34.544 143.085,34.553 143.935,34.553 143.944,34.544 147.727,34.544 150.876,37.693 150.876,38.862 v1(151.638,39.624)
fbLED_SDO: U1.43 U10.2 | length 31.2
  Top Layer w0.2: U1.43@151.134,42.171 151.134,40.39 150.622,39.878 150.622,37.084 v1(152.4,35.306)
  Bottom Layer w0.2: U10.2@141.734,23.469 141.748,23.455 151.725,23.455 153.924,25.654 153.924,33.782 v1(152.4,35.306)
fbled_SDO_to_front: P1.5 pad.39 U12.14 | length 36.1
  Top Layer w0.2: v1(27.686,37.846) 28.956,37.846 P1.5@30.48,39.37
  Bottom Layer w0.2: U12.14@25.906,22.819 22.311,22.819 21.59,22.098 17.018,22.098 15.748,23.368 15.748,29.718 pad.39@17.78,31.75 23.876,37.846 v1(27.686,37.846)
GND: C1.2 C2.2 C3.1 C4.2 C5.2 C6.2 C7.1 C8.2 C9.2 D25.K P1.13 P2.4 P3.7 P3.9 P3.11 P3.13 P4.1 P5.1 P5.3 P5.5 pad.2 pad.3 pad.5 pad.6 pad.21@118.11,37.592 pad.51 pad.52 pad.63 R2.1 R3.1 R4.1 R5.2 R6.1 R7.1 R8.1 S1.4 S2.4 S3.4 S4.4 S5.4 S6.4 S7.4 S8.4 S9.4 S10.4 S11.4 S12.4 S13.4 S14.4 S15.4 S16.4 S17.4 S18.4 S19.4 S20.4 S21.4 S22.4 S23.4 S24.4 U1.8 U1.23 U1.35 U1.47 U2.1 U3.1 U4.1 U6.7 U6.8 U7.7 U7.8 U8.7 U8.8 U10.1 U11.1 U12.1 | length 93.8
  Top Layer w0.2: v1(149.134,39.914) U1.47@149.134,42.171 ; U1.23@153.634,33.521 153.634,30.516 154.432,29.718 v1(155.194,29.718) ; U1.35@155.709,40.096 158.968,40.096 v1(158.968,43.18) C6.2@157.718,43.18
  Bottom Layer w0.2: U4.1@32.008,17.504 35.297,17.504 35.814,18.021 v1(35.814,18.034) ; U12.1@32.008,24.108 v1(35.538,24.108) ; U3.1@86.872,17.504 90.161,17.504 90.678,18.021 v1(90.678,18.034) ; U11.1@86.872,24.108 90.161,24.108 90.437,24.384 v1(90.424,24.384) ; C7.1@102.87,35.912 P3.7@102.87,39.37 ; C3.1@127.762,43.148 C2.2@132.588,43.148 137.382,43.148 C1.2@137.414,43.18 138.684,43.18 141.634,40.23 C5.2@143.51,40.23 ; U2.1@141.734,17.515 145.023,17.515 v1(145.542,18.034) ; U10.1@141.736,24.108 149.838,24.108 150.876,25.146 v1(152.146,25.146) ; C4.2@147.066,38.576 147.034,38.608 146.304,38.608 144.682,40.23 C5.2@143.51,40.23 ; v1(149.134,39.914) 146.63,42.418 C8.2@146.574,42.418 145.698,42.418 C5.2@143.51,40.23 ; v1(153.898,23.342) 153.898,23.85 155.194,25.146 v1(155.194,29.718) ; v1@155.448,29.718 v1(155.194,29.718) ; C9.2@156.464,31.528 v1(155.194,29.718) ; v1(158.968,43.18) 158.968,43.398 161.29,45.72 v1(165.1,45.72)
infra_LE: P1.4 pad.47 U1.33 U2.4 U3.4 U4.4 | length 212.5
  Top Layer w0.2: v1(30.226,33.02) 31.049,33.02 31.216,32.853 31.776,32.853 31.943,33.02 32.332,33.02 32.341,33.011 51.636,33.011 51.645,33.02 54.154,33.02 54.33,33.196 54.89,33.196 55.075,33.011 v1(57.15,33.011) 59.243,33.011 59.41,32.844 59.97,32.844 60.137,33.011 77.387,33.011 77.396,33.02 77.785,33.02 77.952,32.853 78.512,32.853 78.679,33.02 v1(79.502,33.02) 80.325,33.02 80.492,33.187 81.052,33.187 81.219,33.02 81.608,33.02 81.617,33.029 131.383,33.029 131.401,33.011 132.251,33.011 132.269,33.029 132.64,33.029 132.816,32.853 133.376,32.853 133.543,33.02 v1(134.366,33.02) 135.189,33.02 135.356,33.187 135.916,33.187 136.092,33.011 136.463,33.011 136.481,33.029 137.331,33.029 137.349,33.011 142.665,33.011 142.687,33.033 143.05,33.033 143.23,32.853 143.79,32.853 143.97,33.033 v1(144.78,33.033) ; v1(154.178,39.624) 154.706,39.096 U1.33@155.709,39.096
  Bottom Layer w0.2: P1.4@27.94,41.91 29.21,40.64 29.21,38.862 30.226,37.846 v1(30.226,33.02) 30.226,32.004 28.702,30.48 28.702,17.16 30.297,15.565 U4.4@32.006,15.565 ; pad.47@57.15,27.94 v1(57.15,33.011) ; v1(79.502,33.02) 80.325,33.02 80.492,33.187 81.052,33.187 81.219,33.02 81.608,33.02 81.617,33.029 82.541,33.029 83.566,32.004 83.566,17.018 85.019,15.565 U3.4@86.87,15.565 ; v1(134.366,33.02) 134.414,32.972 135.142,32.972 135.356,33.187 135.977,33.187 136.135,33.029 137.659,33.029 138.43,32.258 138.43,17.018 139.883,15.565 U2.4@141.734,15.565 ; v1(144.78,33.033) 145.616,33.033 145.77,33.187 146.33,33.187 146.484,33.033 147.828,33.033 152.496,37.701 152.496,37.942 v1(154.178,39.624)